# EAGLE board monjolo_c (EAGLE 6.3)
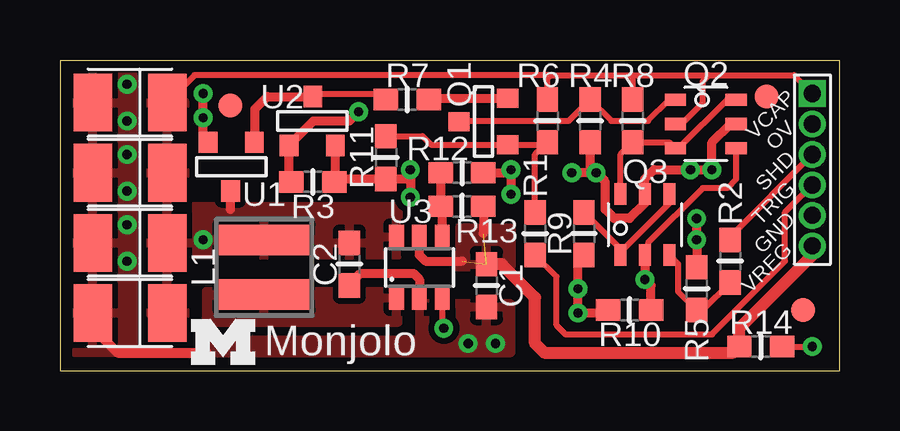
[diagram p0: board, top side]
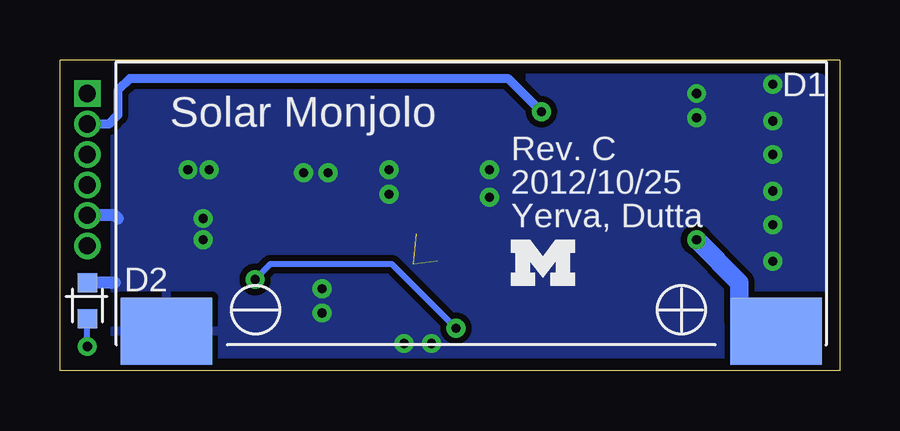
[diagram p1: board, bottom side, seen from below]

Size 32.51 x 12.95 mm. Coordinates in mm from the lower left corner, seen from the top.
Outline: 32.51,0 32.51,12.95 0,12.95 0,0 32.51,0
Copper layers (1*16): Top 0.0178mm / dielectric 59mil / Bottom 0.0178mm
Design rules "SSC-EAGLE-2Lyr_v1.0.0.3 *": minimum track width 6mil, minimum drill 14mil, track to track 6mil, track to pad 6mil, pad to pad 6mil, via to via 6mil, smd to smd 6mil, copper to edge 20mil, drill to drill 16mil, minimum pad ring 8mil, minimum via ring 8mil, stop-mask expansion 3mil, vias tented up to drill 20mil, thermal gap 10mil

## Footprints (pad centres in the part's own frame; a part is rotated, then mirrored left to right if it is on the bottom)
R0603B = smd 1.016 x 0.889: 1 -0.889,0; 2 0.889,0
CAP1210 = smd 2.4 x 1.6: ANODE 0,-1.55; CATHODE 0,1.55
AM-1437 = smd 3.81 x 2.794: + 12.7,-5.334; - -12.7,-5.334
LED-0603 = smd 0.8 x 0.8: A 0,-0.75; C 0,0.75
HD6 = drill 0.711 pad 1.016 square: 1 -2.54,0 | drill 0.711 pad 1.016: 2 -1.27,0; 3 0,0; 4 1.27,0; 5 2.54,0; 6 3.81,0
FIDUCIAL-1X2 = smd 1 x 1: 1 0,0
L2828 = smd 1.27 x 3.81: 1 -1.143,0; 2 1.143,0
SOT-23 = smd 0.787 x 0.889: 1 0.025,-1.016; 2 -0.94,1.016; 3 0.991,1.016
TSOP-6 = smd 0.508 x 0.889: 1 -1.016,-1.27; 2 0,-1.27; 3 1.016,-1.27; 4 1.016,1.27; 5 0,1.27; 6 -1.016,1.27
MINI-3DC = smd 0.787 x 0.889: 1 -0.991,-1.016; 2 0.94,-1.016; 3 0,1.016
SOT-23-6 = smd 0.61 x 1.016: 1 -0.953,-1.27; 2 0,-1.27; 3 0.953,-1.27; 4 0.953,1.27; 5 0,1.27; 6 -0.953,1.27

## Placement (x,y rotation side)
C1  10uF  [R0603B]  17.78,3.56 270 top
C2  4.7uF  [R0603B]  12.06,4.45 270 top
C3  100uF  [CAP1210]  2.92,11.18 270 top
C4  100uF  [CAP1210]  2.92,8.26 270 top
C5  100uF  [CAP1210]  2.92,5.33 270 top
C6  100uF  [CAP1210]  2.92,2.41 270 top
D1  AM-1437  [AM-1437]  15.37,6.99 0 bottom
D2  [LED-0603]  31.37,2.92 0 bottom
JP1  [HD6]  31.37,9.02 270 top
JP2  FIDUCIAL1X2  [FIDUCIAL-1X2]  30.99,2.54 0 top
JP3  FIDUCIAL1X2  [FIDUCIAL-1X2]  7.11,11.05 0 top
JP4  FIDUCIAL1X2  [FIDUCIAL-1X2]  29.46,11.43 0 top
L1  4.7uH  [L2828]  8.51,4.32 270 top
Q1  [SOT-23]  17.65,10.41 270 top
Q2  DUAL_MOSFET_NP  [TSOP-6]  26.92,10.29 270 top
Q3  DUAL_MOSFET_NP  [TSOP-6]  24.38,6.1 0 top
R1  1K  [R0603B]  19.81,5.71 90 top
R2  1K  [R0603B]  27.94,4.57 270 top
R3  1K  [R0603B]  10.54,7.87 0 top
R4  100K  [R0603B]  22.1,10.41 270 top
R5  100K  [R0603B]  26.54,3.43 90 top
R6  100K (DNP)  [R0603B]  20.32,10.41 270 top
R7  100K  [R0603B]  14.48,11.3 0 top
R8  470K  [R0603B]  23.88,10.41 270 top
R9  470K  [R0603B]  21.84,5.71 270 top
R10  470K  [R0603B]  23.75,2.54 180 top
R11  100K  [R0603B]  13.59,8.89 270 top
R12  649K  [R0603B]  16.76,8.26 0 top
R13  976K  [R0603B]  16.76,6.86 180 top
R14  470  [R0603B]  29.21,1.02 0 top
U1  MN1382S 2.0V  [MINI-3DC]  7.11,8.51 180 top
U2  TC54VC 2.9V  [MINI-3DC]  10.54,10.41 0 top
U3  MCP1640T  [SOT-23-6]  14.99,4.32 0 top
U$1  UMICH_SOLID_SMALL  [UMICH_SOLID_75MIL]  5.46,0.25 0 top
U$3  UMICH_SOLID_SMALL  [UMICH_SOLID_75MIL]  13.72,3.56 0 bottom

## Library data of the parts
C1-C6 JP1 L1 R1-R14 U3 = Gecko
D1 D2 U1 U2 = umich
JP2-JP4 = SparkFun-Aesthetics
Q1 = berkeley-epic
Q2 Q3 =  gecko_vreg_revC
U$1 U$3 = logos

## Nets
GND: C1.2 C2.2 C3.ANODE C4.ANODE C5.ANODE C6.ANODE D1.- D2.C JP1.5 Q2.5 Q3.5 R3.2 R4.2 R5.2 R9.2 R10.2 R11.2 R12.2 U1.2 U2.2 U3.2
N$1: R12.1 R13.2 U3.4
N$2: Q1.2 R7.2
N$4: L1.2 U3.1
N$5: D2.A R14.2
N$6: Q3.1 Q3.4 R9.1
N$7: Q1.1 Q2.1 R4.1
N$8: JP1.3 R2.1
N$9: Q2.3 Q2.6 Q3.6 R8.2
N$12: Q3.3 R2.2 R5.1
N$13: JP1.2 R3.1 U2.1
N$14: R7.1 U1.1 U2.3
N$15: Q1.3 R1.2 R6.2 R11.1
N$16: JP1.4 R1.1
N$18: Q2.4 Q3.2 R10.1 U3.3
VCAP: C2.1 C3.CATHODE C4.CATHODE C5.CATHODE C6.CATHODE D1.+ JP1.1 L1.1 Q2.2 R6.1 R8.1 U1.3 U3.6
VREG: C1.1 JP1.6 R13.1 R14.1 U3.5

## Tracks (layer width: path | path; a pad name or v marks a point on that pad's centre or on a via)
GND  (via drill 0.38)
  Top 0.381: C2.2 12.09,3.62 12.53,4.06 14.73,4.06 14.99,3.81 U3.2 | U1.2 5.97,9.73 v5.97,10.54 v5.97,11.56 | R12.2 18.67,8.26 v18.8,8.38 v18.8,7.37 | v22.35,8.26 v21.34,8.26 | R10.2 23.11,2.41 v21.59,2.41 v21.59,3.43 21.59,4.57 R9.2 | v14.61,8.38 v14.61,7.24 14.61,8 R11.2 11.56,8 11.48,7.92 | R3.2 11.48,7.92 | 11.48,7.92 U2.2 | v26.54,6.35 v26.54,5.46 R5.2 | Q2.5 27.94,10.29 27.18,9.53 v27.18,8.38 v26.29,8.38 24.77,8.38 24.38,8 Q3.5 24.38,6.99 23.75,6.35 23.11,6.35 22.73,6.73 22.73,7.87 v22.35,8.26 | R4.2 22.1,8.51 v22.35,8.26
  Top 0.406: C6.ANODE 1.37,1.8 2.41,0.76 6.1,0.76
  Bottom 0.508: JP1.5 30.23,6.48 30.1,6.35 | D2.C 30.36,3.67 30.23,3.68
  other vias: 18.16,1.14 17.02,1.14 2.79,4.57 2.79,6.1 2.79,7.49 2.79,9.02 2.79,10.41 2.79,11.94
  pour Bottom (isolate 0.254): 0.76,0.64 0.76,12.19 30.23,12.19 30.23,0.64
  pour Top (isolate 0.254): 5.97,1.27 5.97,0.76 18.8,0.76 18.8,2.79 14.99,2.79 14.99,1.27
  pour Top (isolate 0.305): 0.64,12.32 3.05,12.32 3.05,0.76 0.64,0.76
N$1
  Top 0.381: R12.1 R13.2 15.94,7.11 U3.4
N$2
  Top 0.381: R7.2 15.42,11.35 Q1.2
N$4
  pour Top (isolate 0.254): 14.1,3.3 6.1,3.3 6.1,2.03 14.1,2.03
N$5  (via drill 0.38)
  Top 0.254: R14.2 v31.37,1.02
  Bottom 0.254: v31.37,1.02 D2.A
N$6
  Top 0.254: Q3.4 25.4,6.99 23.37,4.95 Q3.1 23.37,5.08 R9.1
N$7
  Top 0.254: Q1.1 16.66,10.41 21.21,10.41 R4.1 22.99,10.41 24.51,10.41 25.4,11.3 Q2.1
N$8
  Top 0.254: R2.1 27.94,5.59 JP1.3
N$9
  Top 0.254: Q2.6 27.81,11.3 25.78,9.27 Q2.3 25.4,9.53 R8.2 23.37,9.02 Q3.6
N$12
  Top 0.254: R2.2 26.8,2.54 R5.1 25.78,3.3 25.78,4.45 Q3.3
N$13  (via drill 0.38)
  Top 0.381: R3.1 9.55,7.98 U2.1 10.57,10.41 12.06,10.41 v12.45,10.79
  Bottom 0.381: JP1.2 30.48,10.29 30.1,10.67 30.1,11.68 29.59,12.19 13.84,12.19 v12.45,10.79
N$14
  Top 0.254: R7.1 13.34,11.56 10.79,11.56 U2.3
  Top 0.381: U2.3 8.64,11.43 8.13,10.92 8.13,9.93 U1.1
N$15
  Top 0.254: R11.1 15.11,9.78 15.47,9.42 Q1.3 20.34,9.42 R6.2 19.81,9.02 R1.2
N$16
  Top 0.254: R1.1 20.7,3.94 20.7,1.91 21.08,1.52 27.18,1.52 30.23,4.57 30.23,6.6 JP1.4
N$18  (via drill 0.38)
  Top 0.254: U3.3 15.94,1.84 v16,1.78 | Q2.4 28.19,8 27.81,7.62 26.8,7.62 24.51,5.33 24.51,4.95 Q3.2
  Top 0.381: R10.1 24.64,3.56 v24.38,3.81 Q3.2
  Bottom 0.254: v16,1.78 18.67,4.45 23.75,4.45 v24.38,3.81
VCAP  (via drill 0.38)
  Top 0.254: 20.45,12.32 23.88,12.32 | 23.88,12.32 27.05,12.32 | 27.05,12.32 30.61,12.32 JP1.1 | Q2.2 25.91,10.29 26.8,11.18 26.8,12.06 27.05,12.32 | R6.1 20.32,12.19 20.45,12.32 | R8.1 23.88,12.32 | 20.45,12.32 5.61,12.32 C3.CATHODE
  Top 0.381: 7.11,6.73 U1.3
  Bottom 0.762: D1.+ 4.19,2.08 4.19,3.68 v5.97,5.46
  pour Top (isolate 0.254): 5.21,6.86 14.1,6.86 14.1,4.83 5.21,4.83 5.21,2.29 3.81,2.29 3.81,11.94 5.21,11.94
VREG  (2 unrouted)
  Top 0.381: U3.5 14.99,4.83 15.24,4.57 16.76,4.57 | R13.1 17.65,5.71
  Top 0.508: C1.1 18.41,4.45 19.81,3.05 19.81,1.14 20.19,0.76 28.07,0.76 R14.1 28.32,1.78 31.37,4.83 JP1.6
  pour Top (isolate 0.254): 16.51,5.97 18.8,5.97 18.8,4.32 16.51,4.32

## Text on the board
tPlace: VCAP | OV | SHD | TRIG | GND | VREG | Monjolo
bPlace: Solar Monjolo | Rev. C | 2012/10/25 | Yerva, Dutta
tValues: VCAP | N_P_MOS | OV | PMOS | SHD | TRIG | N_P_MOS | GND | VREG